# Altium PCB Liquid_level.PcbDoc
Units mm, origin at the board's own origin, x right, y up, seen from the top; angles counter-clockwise.
Board outline 23.94 x 68.42 mm, 2 copper layers (Top Layer, Bottom Layer); 8 components, 6 nets, 16 pads, 30 vias.
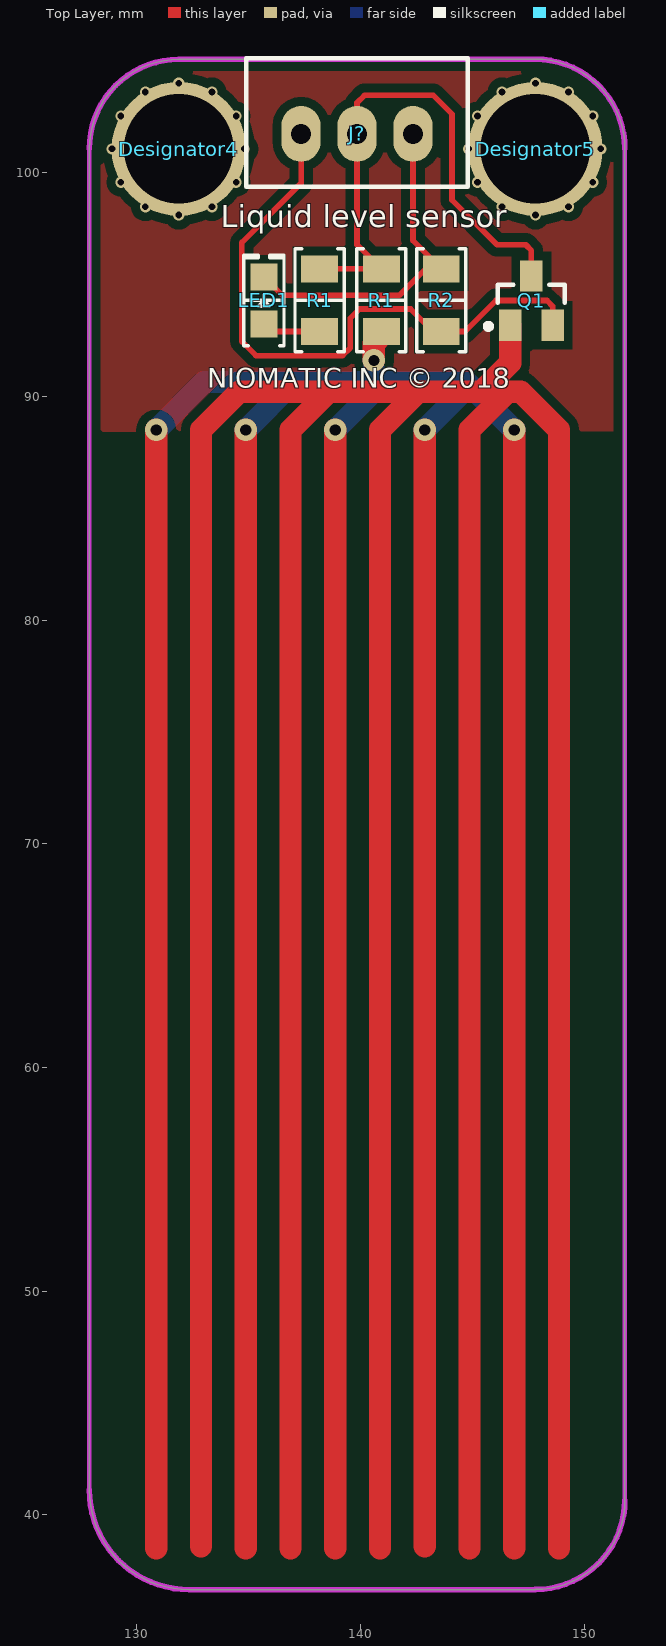
[diagram p0: Top Layer view]
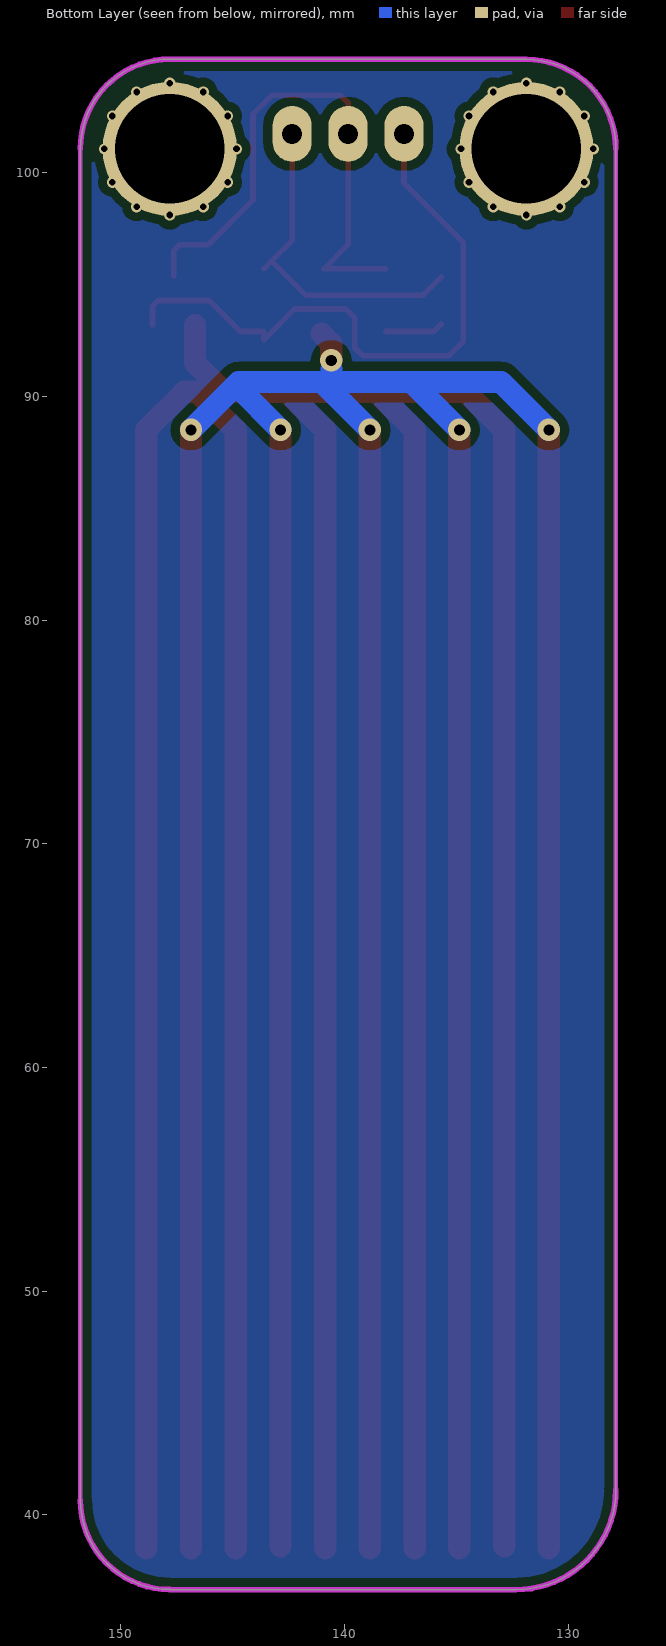
[diagram p1: Bottom Layer view, seen from below]
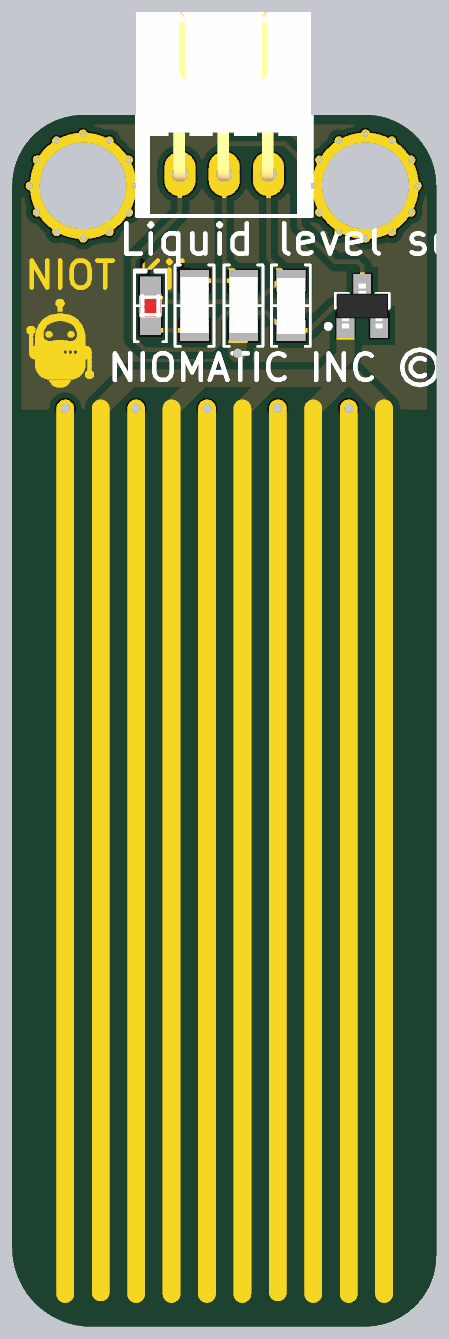
[diagram p2: 3D render of the assembled board from above, using the file's embedded part models]

## Layer stack, top to bottom
Top Solder: solder mask 0.0102, Solder Resist, Dk 3.5
Top Layer: signal copper 0.0356
Dielectric 1: dielectric 0.32, FR-4, Dk 4.8
Bottom Layer: signal copper 0.0356
Bottom Solder: solder mask 0.0102, Solder Resist, Dk 3.5

## Board outline
127.876,41.117 127.876,101.065 cw(c131.876,101.065) 131.876,105.065 131.876,105.074 147.816,105.074 cw(c147.816,101.074) 151.816,101.074 151.816,40.664 cw(c147.816,40.664) 147.816,36.664 147.816,36.655 132.339,36.655 cw(c132.339,41.117)

## Design rules (kind name [scope] priority, off if disabled: settings)
Clearance [All] p1: gap=0.4 ignorepadtopadclearanceinfootprint=FALSE
PolygonConnect [All] p1: connectstyle=Relief reliefconductorwidth=0.254 reliefentries=4 polygonreliefangle="90 Angle" airgapwidth=0.254
RoomDefinition Liquid_level [InComponentClass('Liquid_level')] p1: confinementstyle=ConfineIn formatcopy=TRUE lockcomponents=FALSE outline 0,0 50.8,0 50.8,25.4 0,25.4
RoutingVias [All] p1: holewidth=0.711 width=1.27 viastyle="Through Hole" minholewidth=0.711 minwidth=1.27 maxholewidth=0.711 maxwidth=1.27
SolderMaskExpansion [All] p1: expansion=0.102
Width [All] p1: maxlimit=0.254 minlimit=0.254 preferedwidth=0.254
30 further rules are at their usual default settings.

## Classes and differential pairs
component class Liquid_level: J? LED1 Q1 R1 R2

## Components (designator, comment, footprint, x,y, rotation, side; value= is the part's Value field where it differs from the comment)
Designator4 "Comment" "Lego Hole" 131.876,101.065 r0 top
Designator5 "Comment" "Lego Hole" 147.82,101.065 r0 top
J? "Header" "JST XH B3B-XH-A - RIGHT" 139.846,101.736 r180 top
LED1 "RED" "LED 0805/2012 RED" 135.68,94.29 r90 top value=Green
Q1 "2N3904" SOT23 147.64,94.28 r90 top
R1 "1K" "RES 1206/3216" 138.17,94.3 r90 top
R1 "100R" "RES 1206/3216" 140.93,94.3 r90 top value=1K
R2 "10K" "RES 1206/3216" 143.611,94.3 r270 top value=1K

## Footprints (in the part's own frame and the unit in brackets; to place one, negate y for a bottom-side part, rotate by r counter-clockwise, add the part's x,y. Pads: shape width x height; smd on the part's side, far side on the other; paste and mask are expansions set on the pad)
"JST XH B3B-XH-A - RIGHT" [mm]
  oval 1.75x2.5 hole 0.9: 1(-2.5,0) 2(0,0) 3(2.5,0)
  silkscreen extent -4.95,-3.38 4.95,2.38, body extent -4.9,-9.15 5,2.35, height 6.1
"LED 0805/2012 RED" [mm] "Chip Diode, 2-Leads, Body 2.00x1.25mm, IPC Medium Density"
  rect 1.2x1.2 smd: 1(-1.05,0) 2(1.05,0)
  silkscreen extent -2.03,-0.9 2.03,0.9, body extent -1,-0.62 1,0.63, height 0.9
"Lego Hole" [mm]
  round 6 hole 4.9: 0(0,0)
"RES 1206/3216" [mm] "Chip Resistor, 2-Leads, Body 3.13x1.55mm, IPC Medium Density"
  rect 1.2x1.65 smd: 1(-1.4,0) 2(1.4,0)
  silkscreen extent -2.3,-1.1 2.3,1.1, body extent -1.57,-0.8 1.62,0.8, height 0.6
SOT23 [mm]
  rect 1.4x1 smd: B(-1.1,0.95) C(1.1,0) E(-1.1,-0.95)
  silkscreen extent -1.27,-1.5 0.7,2.05, body extent -1.27,-1.46 1.27,1.46, height 1

## Part data
J?: library part "3 Pin"
LED1: library part LED, "Chip LED"
Q1: library part 2N2222, "NPN", De="Seyed Mohsen Ghasemian", E-mail=picpars@gmail.com, web=www.picpars.com
R1 R1 R2: library part Resistor, "SMT Resistor"

## Via types
v1: diameter 0.5, hole 0.3, Top Layer to Bottom Layer, 24 vias
v2: diameter 1, hole 0.5, Top Layer to Bottom Layer, tented bottom, 5 vias
v3: diameter 1, hole 0.5, Top Layer to Bottom Layer, tented both sides, 1 vias

## Nets (pads, with @x,y where several pads share a name; then routed paths per layer and width w, separated by ;. In a path a pad name is that pad's centre, name@x,y a point inside that pad or via, vN(x,y) a via of type N, cw(c..) or ccw(c..) an arc to the next point about the centre after c; other vN are vias at no path point)
GND: J?.1 LED1.2 R2.1 | length 15.1
  Top Layer w0.254: LED1.2 136.507,94.513 141.732,94.513 R2.1@143.265,96.046 ; J?.1 142.346,96.965 R2.1@143.265,96.046 ; R2.1 R2.1@143.265,96.046
NetLED1_1: LED1.1 R1.1@138.17,92.9 | length 2.6
  Top Layer w0.254: LED1.1 136.02,92.9 R1.1@138.17,92.9
PROBE1: Q1.B | length 337.5
  Top Layer w0.254: 132.871,82.266 132.871,88.5 ; 136.871,38.5 136.871,41.148 ; 144.19,90.32 145.52,90.32 ; 144.871,39.076 144.871,88.5
  Top Layer w1: 132.871,38.59 132.871,88.5 134.571,90.2 138.571,90.2 ; 136.871,38.5 136.871,88.5 138.571,90.2 ; 140.871,38.5 140.871,88.5 142.53,90.159 ; 144.871,38.5 144.871,88.5 146.571,90.2 ; 145.52,90.32 146.69,91.49 Q1.B ; 148.871,38.5 148.871,88.5 147.171,90.2 146.571,90.2 ; 138.571,90.2 146.571,90.2
PROBE2: R1.1@140.93,92.9 | length 278.4
  Top Layer w1: 130.871,38.5 v2(130.871,88.5) ; 134.871,38.5 v2(134.871,88.5) ; 138.871,38.5 v2(138.871,88.5) ; v3(140.6,91.61) 140.6,92.37 R1.1@141.03,92.8 ; 142.871,38.59 v2(142.871,88.5) ; 146.871,38.5 v2(146.871,88.5)
  Bottom Layer w1: v2(130.871,88.5) 133.011,90.64 137.011,90.64 ; v2(134.871,88.5) 137.011,90.64 ; v2(138.871,88.5) 141.011,90.64 ; v3@140.59,91.199 140.59,90.64 ; v2(142.871,88.5) 144.802,90.431 144.772,90.46 ; v2(146.871,88.5) 144.731,90.64 141.011,90.64 ; 137.011,90.64 140.59,90.64 ; 140.59,90.64 141.011,90.64
SIG: J?.3 Q1.E R2.2 | length 28.6
  Top Layer w0.254: J?.3 137.346,99.526 134.696,96.876 134.696,92.456 135.331,91.821 139.192,91.821 139.548,92.177 139.548,93.497 139.954,93.904 142.24,93.904 143.611,92.532 R2.2 144.665,92.9 146.05,94.285 148.336,94.285 148.59,94.031 Q1.E
VCC: J?.2 Q1.C R1.2 | length 24.8
  Top Layer w0.254: R1.2@138.17,95.7 140.93,95.7 139.846,96.784 J?.2 139.846,103.124 140.177,103.454 143.256,103.454 144.094,102.616 144.094,98.781 146.101,96.774 147.386,96.774 147.64,96.52 Q1.C
pads on no net: Designator4.0 Designator5.0
copper on no net:
  other v1: 131.876,98.105 147.82,98.105 130.382,98.476 133.357,98.476 146.325,98.476 149.301,98.476 129.288,99.57 134.44,99.57 145.231,99.57 150.384,99.57 128.887,101.065 134.797,101.065 144.831,101.065 150.741,101.065 129.288,102.53 134.44,102.53 145.231,102.53 150.384,102.53 130.382,103.603 133.357,103.603 146.325,103.603 149.301,103.603 131.876,103.995 147.82,103.995

## Polygon pours and split planes (outlines as drawn)
no net on Bottom Layer "Top Layer-No Net1" (solid, pour order 1): 127.876,41.117 127.876,101.065 cw(c131.876,101.065) 131.876,105.065 131.876,105.074 147.816,105.074 cw(c147.816,101.074) 151.816,101.074 151.816,40.664 cw(c147.816,40.664) 147.816,36.664 147.816,36.655 132.339,36.655 cw(c132.339,41.117)
no net on Top Layer "Top Layer-No Net" (solid, pour order 0): 127.876,88.427 127.876,101.065 cw(c131.876,101.065) 131.876,105.065 147.816,105.074 cw(c147.816,101.074) 151.816,101.074 151.816,88.441

## Keep-outs
Keep-Out Layer:
  lines w0.203: 127.876,41.117 127.876,101.065 ; 151.816,40.664 151.816,101.074
  lines w0.254: 127.876,41.117 ccw(c132.339,41.117) 132.339,36.655 147.816,36.655 ; 127.876,101.065 cw(c131.876,101.065) 131.876,105.065 ; 131.876,105.074 147.816,105.074 cw(c147.816,101.074) 151.816,101.074 ; 147.816,36.664 ccw(c147.816,40.664) 151.816,40.664

## Other copper
Top Layer:
  region: 143.785,56.55
  region: 127.475,56.82

## Silkscreen, mask and mechanical layers (free items; w line width, h text height)
Top Overlay:
  text "Liquid level sensor" at 133.75,97.23 h1.7
  text "NIOMATIC INC © 2018" at 133.15,90.09 h1.5
Top Solder:
  drawing of 381 lines, arcs and shapes, not listed
  text "NIOT Kit" at 128.45,95.31 h1.52